# Altium PCB StreamDeck_PCB-V0.PcbDoc
Units mil, origin at the board's own origin, x right, y up, seen from the top; angles counter-clockwise.
Board outline 4603.97 x 3738.97 mil, 2 copper layers (Top Layer, Bottom Layer); 59 components, 44 nets, 276 pads, 21 vias.
Unrouted connection lines stored in the file: 149.
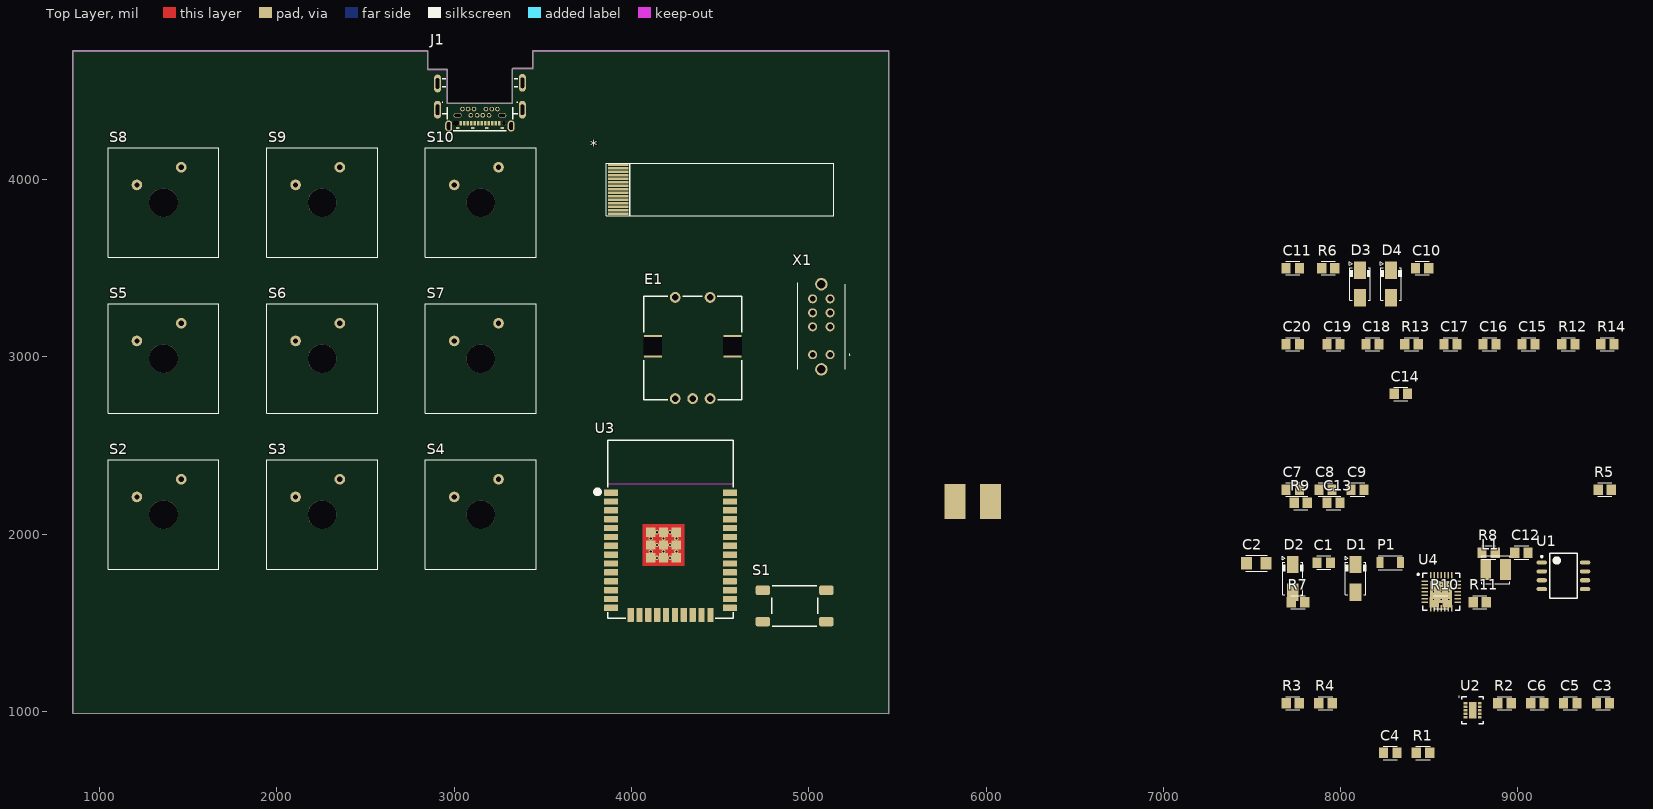
[diagram p0: Top Layer view]
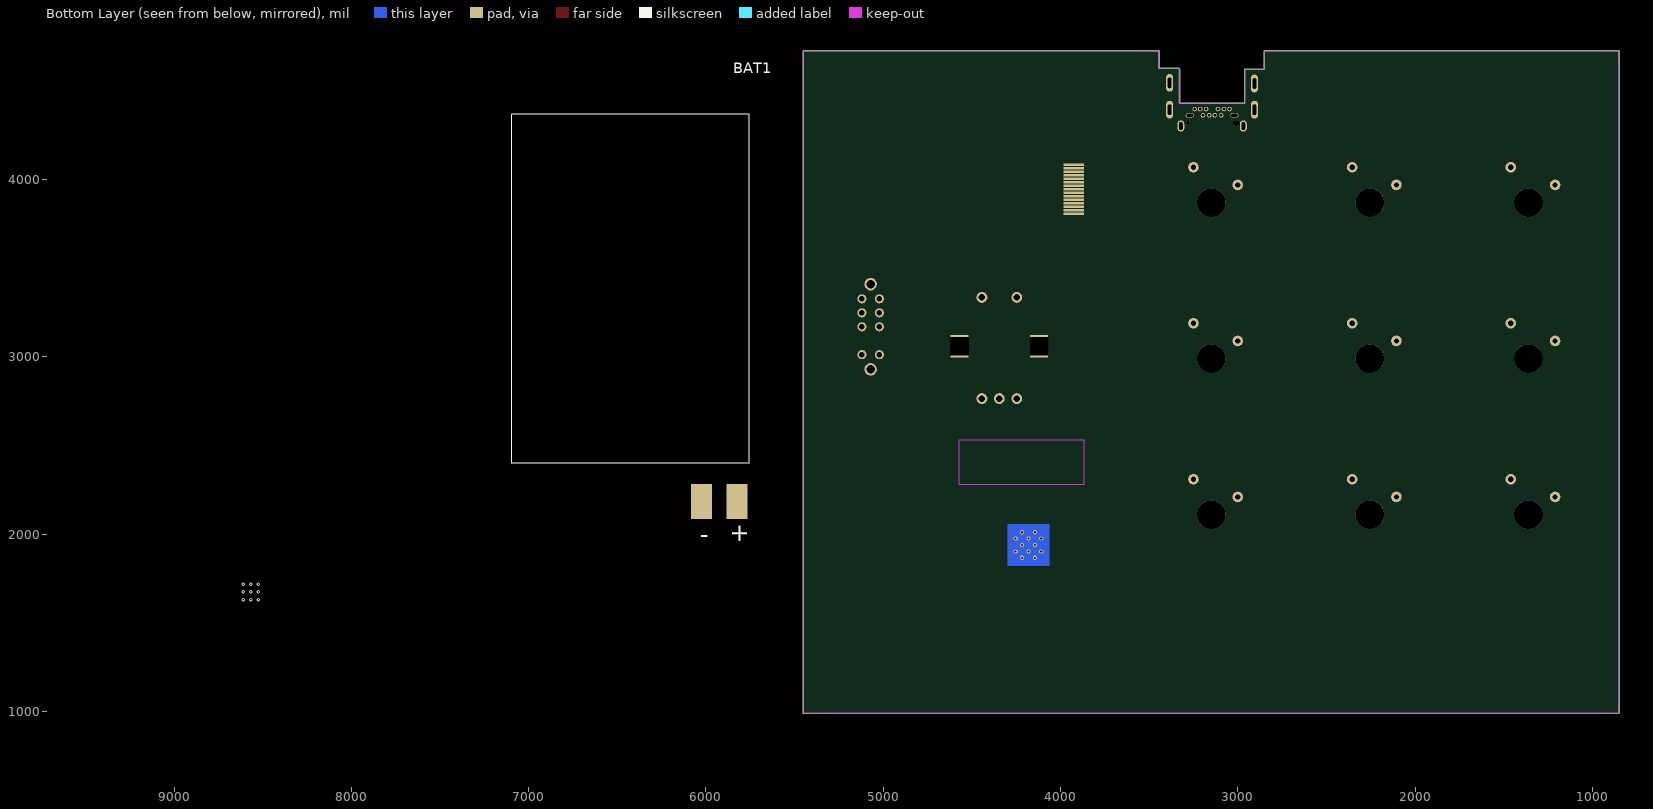
[diagram p1: Bottom Layer view, seen from below]

## Layer stack, top to bottom
Top Solder: solder mask 0.4, Solder Resist, Dk 3.5
Top Layer: signal copper 1.4
Dielectric 1: dielectric 12.6, FR-4, Dk 4.8
Bottom Layer: signal copper 1.4
Bottom Solder: solder mask 0.4, Solder Resist, Dk 3.5

## Board outline
848.02,990 848.02,4725 850,4726.98 2850,4726.98 2851.98,4725 2851.98,4621.98 2960,4621.98 2961.98,4620 2961.98,4431.98 3328.02,4431.98 3328.02,4625 3330,4626.98 3443.02,4626.98 3443.02,4725 3445,4726.98 5450,4726.98 5451.98,4725 5451.98,990 5450,988.02

## Design rules (kind name [scope] priority, off if disabled: settings)
Clearance [All] p1: gap=10 ignorepadtopadclearanceinfootprint=FALSE
PolygonConnect [All] p1: connectstyle=Relief reliefconductorwidth=10 reliefentries=4 polygonreliefangle="90 Angle" airgapwidth=10
RoutingVias [All] p1: holewidth=28 width=50 viastyle="Through Hole" minholewidth=28 minwidth=50 maxholewidth=28 maxwidth=50
SolderMaskExpansion [All] p1: expansion=4 istentingtop=FALSE
SupplyNets "Schematic Supply Nets_4" [InNet('GND')] p1: voltage=0.000
SupplyNets "Schematic Supply Nets_3" [InNet('+3v3')] p2: voltage=0.000
SupplyNets "Schematic Supply Nets_2" [InNet('VBUS_USB')] p3: voltage=0.000
SupplyNets "Schematic Supply Nets_1" [InNet('VBUS')] p4: voltage=0.000
SupplyNets "Schematic Supply Nets" [InNet('VBAT')] p5: voltage=0.000
Width [All] p1: maxlimit=10 minlimit=10 preferedwidth=10
30 further rules are at their usual default settings.

## Classes and differential pairs
component class uC: C10 C11 D3 D4 R6 U4
component class Perifericos: * C12 C13 C14 C15 C16 C17 C18 C19 C20 E1 LL1 R7 R8 R9 R10 R11 R12 R13 R14 S2 S3 S4 S5 S6 S7 S8 S9 S10 X1
component class "Alimentacion uC": C7 C8 C9 R5 S1 U3
component class Alimentacion: BAT1 C1 C2 C3 C4 C5 C6 D1 D2 J1 L1 P1 R1 R2 R3 R4 U1 U2

## Components (designator, comment, footprint, x,y, rotation, side; value= is the part's Value field where it differs from the comment)
* "Display OLED" "DISPLAY OLED -  0.91''" 4565,3945 r0 top
BAT1 "LP103450" BAT-PAD-CONECTOR 6425,3385 r90 bottom
C1 "10uF 15v X7R" C_0805 7905,1840 r0 top
C2 "10uF 15v X7R" C_1206 7525,1835 r0 top
C3 "10uF 15v X7R" C_0805 9480,1046.26 r0 top
C4 "10uF 15v X7R" C_0805 8280,766.26 r0 top
C5 "10uF 15v X7R" C_0805 9295,1046.26 r0 top
C6 "0.1uF 15v X7R" C_0805 9110,1046.26 r0 top
C7 "0.1uF 15v X7R" C_0805 7730,2251.26 r0 top
C8 "0.1uF 15v X7R" C_0805 7915,2251.26 r0 top
C9 "10uF 15v X7R" C_0805 8095,2251.26 r0 top
C10 "0.1uF 15v X7R" C_0805 8460,3501.26 r0 top
C11 "0.1uF 15v X7R" C_0805 7730,3501.26 r0 top
C12 "1uF 15v X7R" C_0805 9020,1896.26 r0 top
C13 "1uF 15v X7R" C_0805 7960,2176.26 r0 top
C14 "1uF 15v X7R" C_0805 8340,2791.26 r0 top
C15 "1uF 15v X7R" C_0805 9060,3071.26 r0 top
C16 "1uF 15v X7R" C_0805 8840,3071.26 r0 top
C17 "1uF 15v X7R" C_0805 8620,3071.26 r0 top
C18 "1uF 15v X7R" C_0805 8180,3071.26 r0 top
C19 "1uF 15v X7R" C_0805 7960,3071.26 r0 top
C20 "1uF 15v X7R" C_0805 7730,3071.26 r0 top
D1 "S1G" D_SMA 8085,1750 r90 top
D2 "SMAJ5.0A" D_SMA 7730,1750 r90 top
D3 "SMAJ5.0A" D_SMA 8110,3411.26 r90 top
D4 "SMAJ5.0A" D_SMA 8285,3411.26 r90 top
E1 "KY040" "Encoder 5 pines" 4345,3060 r0 top
J1 "USB Type C" USB-C 3145,4495 r0 top
L1 "2.2uH" LQH44 8875,1800 r0 top
P1 "nanoSMDC035F" NANOSMDC 8280,1840 r0 top
R1 "100 - 5%" R_0805 8465,766.26 r0 top
R2 "5k1 - 1%" R_0805 8925,1046.26 r0 top
R3 "5k1 - 1%" R_0805 7730,1046.26 r0 top
R4 "5k1 - 1%" R_0805 7915,1046.26 r0 top
R5 "10k - 5%" R_0805 9490,2251.26 r0 top
R6 "10k - 5%" R_0805 7930,3501.26 r0 top
R7 "1k - 5%" R_0805 7760,1616.26 r0 top
R8 "1k - 5%" R_0805 8835,1896.26 r0 top
R9 "1k - 5%" R_0805 7775,2176.26 r0 top
R10 "10k - 5%" R_0805 8565,1616.26 r0 top
R11 "10k - 5%" R_0805 8785,1616.26 r0 top
R12 "10k - 5%" R_0805 9285,3071.26 r0 top
R13 "390k - 1%" R_0805 8400,3071.26 r0 top
R14 "10k - 5%" R_0805 9505,3071.26 r0 top
S1 "Boot" "TACT Switch SMD" 4920,1595 r90 top
S2 "Switch" "MECHANICAL SWITCH" 1360,2110 r0 top
S3 "Switch" "MECHANICAL SWITCH" 2255,2110 r0 top
S4 "Switch" "MECHANICAL SWITCH" 3150,2110 r0 top
S5 "Switch" "MECHANICAL SWITCH" 1360,2990 r0 top
S6 "Switch" "MECHANICAL SWITCH" 2255,2990 r0 top
S7 "Switch" "MECHANICAL SWITCH" 3150,2990 r0 top
S8 "Switch" "MECHANICAL SWITCH" 1360,3870 r0 top
S9 "Switch" "MECHANICAL SWITCH" 2255,3870 r0 top
S10 "Switch" "MECHANICAL SWITCH" 3150,3870 r0 top
U1 "TP4056" "SOP8 - IPC" 9257.05,1765 r0 top
U2 "TPS63001" "VSON - 10" 8745,1006.26 r0 top
U3 "ESP32-WROOM-32" "Espressif ESP32-WROOM-32" 4220,1938.7 r0 top
U4 "CP2102" QFN-28N 8567.48,1674.68 r0 top
X1 "EG2315" EG2315 5120,3012.52 r90 top

## Footprints (in the part's own frame and the unit in brackets; to place one, negate y for a bottom-side part, rotate by r counter-clockwise, add the part's x,y. Pads: shape width x height; smd on the part's side, far side on the other; paste and mask are expansions set on the pad)
BAT-PAD-CONECTOR [mm]
  rect 5x3 all layers, no hole: 1(-30.48,-15.24) 2(-30.48,-10.16)
  silkscreen extent -25,-17 25,17, body extent -25.36,-17.23 27.74,17.23, height 5.46
C_0805 [mm] "Chip Capacitor, 2-Leads, Body 2.00x1.25mm"
  rect 1.3x1.5 smd: 1(-0.95,0) 2(0.95,0)
  silkscreen extent -1.02,-0.95 1.02,0.95, body extent -1,-0.62 1,0.63, height 0.78
C_1206 [mm]
  rect 1.6x1.8 smd: 1(-1.4,0) 2(1.4,0)
  silkscreen extent -1.52,-1.14 1.52,1.14, body extent -1.6,-0.8 1.6,0.8, height 1
D_SMA [mm]
  rect 2.5x1.7 smd: 1(-2,0) 2(2,0)
  silkscreen extent -2.3,-1.52 3.17,1.52, body extent -2.74,-1.4 2.74,1.4, height 2.39
"DISPLAY OLED -  0.91''" [mm]
  rect 3x0.35 all layers, no hole mask+0: 1(-16.25,-3.5) 2(-16.25,-3) 3(-16.25,-2.5) 4(-16.25,-2) 5(-16.25,-1.5) 6(-16.25,-1) 7(-16.25,-0.5) 8(-16.25,0) 9(-16.25,0.5) 10(-16.25,1) 11(-16.25,1.5) 12(-16.25,2) 13(-16.25,2.5) 14(-16.25,3) 15(-16.25,3.5)
  silkscreen extent -17.94,-3.75 14.62,3.75, body extent -20.5,-6.75 12.39,5.1, height 4.81
EG2315 [mm]
  round 1.3 hole 0.8: 1(0,0) 2(4,0) 3(6,0) 4(8,0) 5(0,2.5) 6(4,2.5) 7(6,2.5) 8(8,2.5)
  round 1.8 hole 1.2: MH1(-2.1,1.25) MH2(10.1,1.25)
  silkscreen extent -2.1,-2.85 10.3,4.65, body extent -2.3,-5.75 10.3,4.55, height 5
"Encoder 5 pines" [mm] "Rotary Encoder Mechanical 12 Quadrature (Incremental) Vertical, 12.5x13.4mm Body"
  round 1.55 hole 0.95: 1(-2.5,7) 2(2.5,7) A(-2.5,-7.5) B(0,-7.5) C(2.5,-7.5)
  rect 2.6x3.2 hole 2.6 square: S(-5.7,0) S(5.7,0)
  silkscreen extent -7,-7.7 7,7.2, body extent -7,-7.7 7,7.2, height 22.1
"Espressif ESP32-WROOM-32" [mm] "39-SMD Module"
  rrect10% 2x0.9 smd paste+0 mask+0.05: 1(-8.5,7.51) 2(-8.5,6.24) 3(-8.5,4.97) 4(-8.5,3.7) 5(-8.5,2.43) 6(-8.5,1.16) 7(-8.5,-0.11) 8(-8.5,-1.38) 9(-8.5,-2.65) 10(-8.5,-3.92) 11(-8.5,-5.19) 12(-8.5,-6.46) 13(-8.5,-7.73) 14(-8.5,-9) 25(8.5,-9) 26(8.5,-7.73) 27(8.5,-6.46) 28(8.5,-5.19) 29(8.5,-3.92) 30(8.5,-2.65)
  rrect10% 0.9x2 smd paste+0 mask+0.05: 15(-5.715,-10) 16(-4.445,-10) 17(-3.175,-10) 18(-1.905,-10) 19(-0.635,-10) 20(0.635,-10) 21(1.905,-10) 22(3.175,-10) 23(4.445,-10) 24(5.715,-10)
  rect 2x0.9 smd paste+0 mask+0.05: 31(8.5,-1.38) 32(8.5,-0.11) 33(8.5,1.16) 34(8.5,2.43) 35(8.5,3.7) 36(8.5,4.97) 37(8.5,6.24) 38(8.5,7.51)
  rect 1.33x1.33 smd paste+0 mask+0.05: 39(-2.835,-1.835) 39(-2.835,0) 39(-2.835,1.835) 39(-1,0) 39(-1,-1.835) 39(-1,1.835) 39(0.835,-1.835) 39(0.835,0) 39(0.835,1.835)
  Top Layer region: -4,-3 2,-3 2,3 -4,3
  Bottom Layer region: -4,-3 2,-3 2,3 -4,3
  Keep-Out Layer region: -9,15 9,15 9,8.7 -9,8.7
  silkscreen extent -10.71,-10.5 9,15, body extent -9,-10.5 9,15, height 3.2
LQH44 [mm]
  rect 1.55x3 smd: 1(-1.425,0) 2(1.425,0)
  silkscreen extent -2,-2 2,2, body extent -2,-2 2,2, height 1.65
"MECHANICAL SWITCH" [mil] "Gateron RED pro 3.0"
  round 60 hole 30: 1(-150,100) 2(100,200)
  round 161.42 hole 161.42: NC(0,0)
  silkscreen extent -313,-309 313,309, body extent -308,-275 306,275, height 404
NANOSMDC [mm]
  rect 1x1.6 smd: 1(-1.5,0) 2(1.5,0)
  silkscreen extent -1.7,-1 1.7,1, body extent -1.6,-0.8 1.6,0.8, height 1
QFN-28N [mm] "QFN, 28-Leads, Body 5,00x5,00mm, Pitch 0,50mm, Thermal Pad 3,15x3,15mm, IPC Medium Density"
  oval 0.95x0.25 smd: 1(-2.35,1.5) 2(-2.35,1) 3(-2.35,0.5) 4(-2.35,0) 5(-2.35,-0.5) 6(-2.35,-1) 7(-2.35,-1.5) 15(2.35,-1.5) 16(2.35,-1) 17(2.35,-0.5) 18(2.35,0) 19(2.35,0.5) 20(2.35,1) 21(2.35,1.5)
  oval 0.25x0.95 smd: 8(-1.5,-2.35) 9(-1,-2.35) 10(-0.5,-2.35) 11(0,-2.35) 12(0.5,-2.35) 13(1,-2.35) 14(1.5,-2.35) 22(1.5,2.35) 23(1,2.35) 24(0.5,2.35) 25(0,2.35) 26(-0.5,2.35) 27(-1,2.35) 28(-1.5,2.35)
  rect 3.15x3.15 smd: 29(0,0)
  silkscreen extent -3.42,-2.65 2.65,2.65, body extent -2.52,-2.52 2.52,2.52, height 0.9
R_0805 [mm] "Chip Resistor, 2-Leads, Body 2.00x1.25mm, IPC Low Density"
  rect 1.35x1.5 smd: 1(-0.95,0) 2(0.95,0)
  silkscreen extent -1.02,-0.95 1.02,0.95, body extent -1,-0.62 1,0.62, height 0.6
"SOP8 - IPC" [mm] "TSOP, 8-Leads, Body 6,35x4,32mm, Pitch 1,27mm, IPC Medium Density"
  oval 1.5x0.6 smd: 1(-3.1,1.905) 2(-3.1,0.635) 3(-3.1,-0.635) 4(-3.1,-1.905) 5(3.1,-1.905) 6(3.1,-0.635) 7(3.1,0.635) 8(3.1,1.905)
  silkscreen extent -3.22,-3.2 1.95,3.2, body extent -3.15,-3.2 3.15,3.2, height 1.5
"TACT Switch SMD" [mm] "TE FSM6JSMA"
  rrect50% 1.4x2.1 smd: 1(2.25,4.55) 2(2.25,-4.55) 3(-2.25,4.55) 4(-2.25,-4.55)
  silkscreen extent -2.92,-3.3 2.92,3.3, body extent -3,-5 3,5, height 7.11
USB-C [mm]
  rect 0.35x0.6 smd: A1(2.75,-4.5) A2(2.25,-4.5) A3(1.75,-4.5) A4(1.25,-4.5) A5(0.75,-4.5) A6(0.25,-4.5) A7(-0.25,-4.5) A8(-0.75,-4.5) A9(-1.25,-4.5) A10(-1.75,-4.5) A11(-2.25,-4.5) A12(-2.75,-4.5)
  oval 1.15x0.65 hole 0.4 slot 0.9 at 0 deg: B1(-3.2,-3.36) B12(3.2,-3.36)
  round 0.65 hole 0.4: B2(-2.5,-2.46) B3(-1.7,-2.46) B4(-1.3,-3.36) B5(-0.85,-2.46) B6(-0.4,-3.36) B7(0.4,-3.36) B8(0.85,-2.46) B9(1.3,-3.36) B10(1.7,-2.46) B11(2.5,-2.46)
  oval 0.85x0.65 hole 0.65 slot 0.85 at 0 deg unplated mask+0.102: M(-3.45,-4.5)
  round 0.6 hole 0.6 unplated mask+0.102: M(3.45,-4.5)
  oval 1x2.56 hole 0.5 slot 1.5 at 90 deg: S(-6.075,-2.56) S(-6.075,1.2) S(6.075,-2.56) S(6.075,1.3)
  oval 1x1.6 hole 0.5 slot 1.1 at 90 deg: S(-4.475,-4.9) S(4.475,-4.9)
  rect 0.5x0.3 smd: S(-3.2,-5.19) S(-1,-5.19) S(1,-5.19) S(3.2,-5.19)
  silkscreen extent -5.4,-5.6 5.4,1.9, body extent -6.18,-5.3 6.18,5.4, height 2.27
"VSON - 10" [mm] "PSON, 10-Leads, Body 3,50x2,80mm, Pitch 0,50mm, Thermal Pad 2,40x1,08mm, IPC Medium Density"
  rect 0.55x0.35 smd: 1(-1.015,1) 2(-1.015,0.5) 3(-1.015,0) 4(-1.015,-0.5) 5(-1.015,-1) 6(1.015,-1) 7(1.015,-0.5) 8(1.015,0) 9(1.015,0.5) 10(1.015,1)
  rect 1.08x2.4 smd: 11(0,0)
  silkscreen extent -2,-1.95 1.55,2, body extent -1.4,-1.8 1.4,1.8, height 1

## Part data
*: "Display OLED 0.91'' -  I2C - 128x32px - Controlador SSD1306"
BAT1: "Bateria LiPo LP103450 - 3.7v - 1800mAh - 900mA corriente maxima de carga. Proteccion de descarga, temperatura y sobrecarga"
C1 C2 C3 C4 C5 C6 C7 C8 C9 C10 C11 C12 C13 C14 C15 C16 C17 C18 C19 C20: library part "Capacitor NP", "Capacitor no polarizado"
D1: library part "Diodo Schottky", "Diodo Schottky"
D2 D3 D4: library part "Diodo TVS", "Diodo TVS"
E1: library part Encoder, "Encoder KY040"
J1: library part USB-C, "Conector USB C 3.0"
L1: library part Inductor, "Inductor"
P1: library part "Poly Switch", "Poly Switch"
R1 R2 R3 R4 R5 R6 R7 R8 R9 R10 R11 R12 R13 R14: library part Resistor, "Resistor"
S1: library part "Switch pulsador", "Tact switch PCB"
S2 S3 S4 S5 S6 S7 S8 S9 S10: "Pulsador mecanico - Otemu/Cherry/Gateron"
U1: "Standalone Linear Li-lon Battery Charger with Thermal Regulation in SOP-8"
U2: "High-Efficient Single Inductor Buck-Boost Converter With 1.8-A Switches"
U3: library part ESP32, "Modulo Bluetooth/Wifi/Microcontrolador ESP32-WROOM-32 de EspressIf. 38 pines, SMD, con antena incluida."
U4: "SINGLE-CHIP USB TO UART BRIDGE WITH BUILT IN 3V3 REGULATOR"
X1: "SLIDE, 200mA, 30VDC DP3T, On-On-On Through Hole, Right Angle", Manufacturer_Name=E-Switch, Mouser Part Number=612-EG2315, Datasheet Link=https://configured-product-images.s3.amazonaws.com/2D/specs/EG2315.pdf, Geometry.Height=4.7mm, Manufacturer_Part_Number=EG2315, Mouser Price/Stock=https://www.mouser.co.uk/ProductDetail/E-Switch/EG2315?qs=6C6BR4UgC3OZWOW4uUYcjQ%3D%3D

## Via types
v1: diameter 23.62, hole 11.81, Top Layer to Bottom Layer, 12 vias
v2: diameter 19.68, hole 7.87, Top Layer to Bottom Layer, 9 vias

## Nets (pads, with @x,y where several pads share a name; then routed paths per layer and width w, separated by ;. In a path a pad name is that pad's centre, name@x,y a point inside that pad or via, vN(x,y) a via of type N, cw(c..) or ccw(c..) an arc to the next point about the centre after c; other vN are vias at no path point)
+3v3: *.5 *.8 C3.1 C4.1 C8.1 C9.1 C10.1 C16.1 R5.2 R7.2 R8.2 R9.2 R10.1 R11.1 R12.1 R14.1 U2.1 U2.10 U3.2 U4.7 U4.8
D1: S2.2 S5.2 S8.2 U3.6
D2: S3.2 S6.2 S9.2 U3.7
D3: S4.2 S7.2 S10.2 U3.10
D4: C12.1 R7.1 S2.1 S3.1 S4.1 U3.11
D5: C13.1 R8.1 S5.1 S6.1 S7.1 U3.12
D6: C14.1 R9.1 S8.1 S9.1 S10.1 U3.13
D+: D3.2 J1.A6 J1.B6 U4.4
D-: D4.2 J1.A7 J1.B7 U4.5
ENC-A: E1.A R11.2 U3.26
ENC-B: E1.B R10.2 U3.24
ENC-SW: E1.1 U3.27
GND: *.7 BAT1.2 C1.2 C2.2 C3.2 C4.2 C5.2 C6.2 C7.2 C8.2 C9.2 C10.2 C11.2 C12.2 C13.2 C14.2 C16.2 C17.2 C19.2 C20.2 D2.1 D3.1 D4.1 E1.2 E1.C J1.A1 J1.A12 J1.B1 J1.B12 J1.S R2.1 R3.1 R4.1 R13.1 S1.3 S1.4 U1.1 U1.3 U2.3 U2.9 U3.1 U3.15 U3.38 U4.3 U4.29
  other v2: 8524.17,1631.38 8567.48,1631.38 8610.79,1631.38 8524.17,1674.68 8567.48,1674.68 8610.79,1674.68 8524.17,1717.99 8567.48,1717.99 8610.79,1717.99
Net*_1: *.1 C15.1
Net*_2: *.2 C15.2
Net*_3: *.3 C18.1
Net*_4: *.4 C18.2
Net*_6: *.6 C17.1
Net*_9: *.9 R12.2
Net*_12: *.12 R13.2
Net*_13: *.13 C20.1
Net*_14: *.14 C19.1
NetC6_1: C6.1 R1.1 U2.6 U2.7 U2.8
NetC7_1: C7.1 R5.1 U3.3
NetC11_1: C11.1 R6.1 U4.6
NetD1_2: D1.2 P1.1
NetJ1_A5: J1.A5 R4.2
NetJ1_B5: J1.B5 R3.2
NetL1_1: L1.1 U2.4
NetL1_2: L1.2 U2.2
NetR2_2: R2.2 U1.2
NetR6_2: R6.2 U4.9
NetR14_2: R14.2 X1.2
NetS1_1: S1.1 S1.2 U3.25
RxD: U3.35 U4.25
SCK: *.10 U3.22
SDA: *.11 U3.21
SW1: U3.29 X1.1
SW2: U3.30 X1.3
SW3: U3.31 X1.4
TxD: U3.34 U4.26
VBAT: BAT1.1 C1.1 C5.1 R1.2 U1.5 U2.5
VBUS: C2.1 D2.2 P1.2 U1.4 U1.8
VBUS_USB: D1.1 J1.A4 J1.A9 J1.B4 J1.B9
pads on no net: *.15 E1.S J1.A2 J1.A3 J1.A8 J1.A10 J1.A11 J1.B2 J1.B3 J1.B8 J1.B10 J1.B11 J1.M S2.NC S3.NC S4.NC S5.NC S6.NC S7.NC S8.NC S9.NC S10.NC U1.6 U1.7 U2.11 U3.4 U3.5 U3.8 U3.9 U3.14 U3.16 U3.17 U3.18 U3.19 U3.20 U3.23 U3.28 U3.32 U3.33 U3.36 U3.37 U3.39 U4.1 U4.2 U4.10 U4.11 U4.12 U4.13 U4.14 U4.15 U4.16 U4.17 U4.18 U4.19 U4.20 U4.21 U4.22 U4.23 U4.24 U4.27 U4.28 X1.5 X1.6 X1.7 X1.8 X1.MH1 X1.MH2
copper on no net:
  other v1: 4144.51,1866.46 4216.75,1866.46 4108.39,1902.58 4180.63,1902.58 4252.87,1902.58 4144.51,1938.7 4216.75,1938.7 4108.39,1974.82 4180.63,1974.82 4252.87,1974.82 4144.51,2010.94 4216.75,2010.94

## Keep-outs
Keep-Out Layer:
  lines w3.94: 2955,4620 2960,4620 ; 2960,4620 2850,4620 2850,4725 850,4725 850,990 5450,990 5450,4725 3445,4725 3445,4625 3330,4625 3330,4430 2960,4430 2960,4620

## Text inside footprints (layer, text, board x,y; h text height)
BAT1: Bottom Overlay "-" at 5985,2024.99 h100 r180; Bottom Overlay "+" at 5768.34,1945.01 h100 r270